# EAGLE board KeyVelocitysch (EAGLE 4.13)
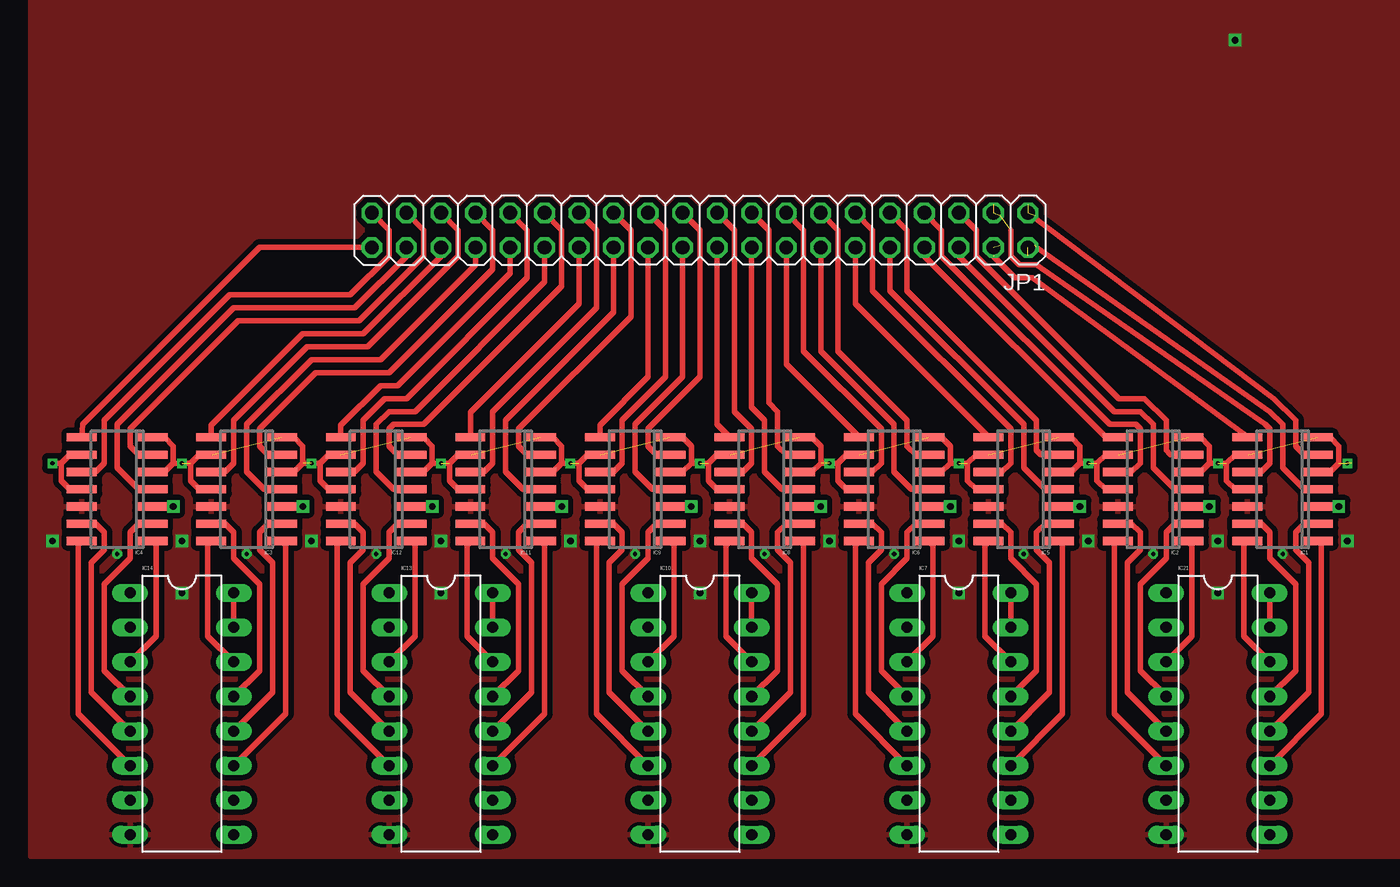
[diagram p0: board, top side]
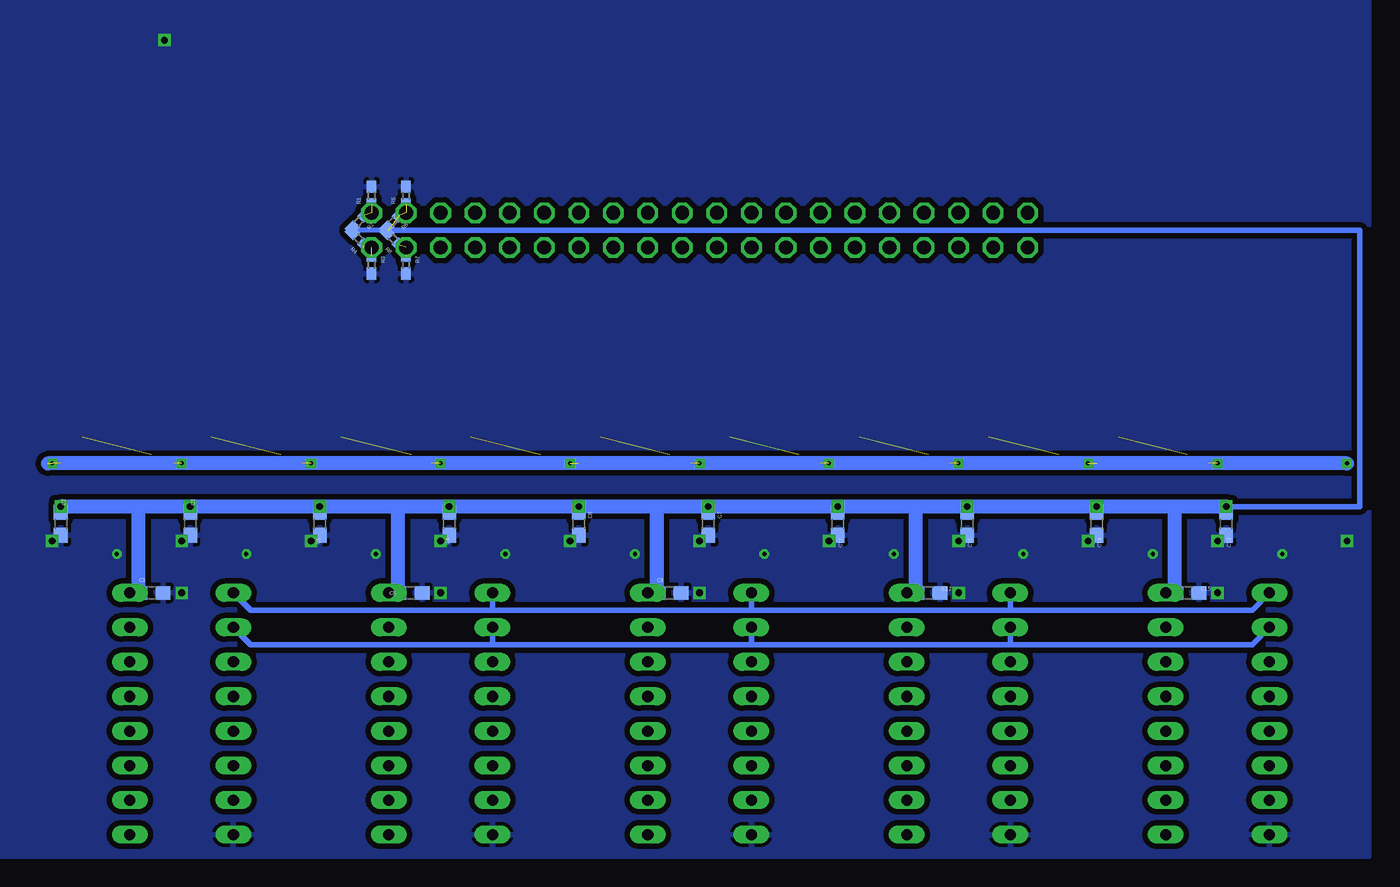
[diagram p1: board, bottom side, seen from below]

No outline drawn. Coordinates in mm, seen from the top.
Copper layers (1*16): Top 0.035mm / dielectric 1.5mm / Bottom 0.035mm
Design rules "default": minimum track width 10mil, minimum drill 24mil, track to track 8mil, track to pad 8mil, pad to pad 8mil, via to via 8mil, smd to smd 8mil, copper to edge 40mil, drill to drill 8mil, minimum pad ring 10mil, minimum via ring 8mil, stop-mask expansion 4mil, vias tented up to drill 0mil, thermal gap 10mil

## Footprints (pad centres in the part's own frame; a part is rotated, then mirrored left to right if it is on the bottom)
C0603 = smd 1.1 x 1: 1 -0.85,0; 2 0.85,0
SO14 = smd 0.6 x 2.2: 1 -3.81,-2.6; 2 -2.54,-2.6; 3 -1.27,-2.6; 4 0,-2.6; 5 1.27,-2.6; 6 2.54,-2.6; 7 3.81,-2.6; 8 3.81,2.6; 9 2.54,2.6; 10 1.27,2.6; 11 0,2.6; 12 -1.27,2.6; 13 -2.54,2.6; 14 -3.81,2.6
DIL16 = drill 0.813 long: 1 -8.89,-3.81; 2 -6.35,-3.81; 3 -3.81,-3.81; 4 -1.27,-3.81; 5 1.27,-3.81; 6 3.81,-3.81; 7 6.35,-3.81; 8 8.89,-3.81; 9 8.89,3.81; 10 6.35,3.81; 11 3.81,3.81; 12 1.27,3.81; 13 -1.27,3.81; 14 -3.81,3.81; 15 -6.35,3.81; 16 -8.89,3.81
2X20 = drill 1.016 octagon: 1 -24.13,-1.27; 2 -24.13,1.27; 3 -21.59,-1.27; 4 -21.59,1.27; 5 -19.05,-1.27; 6 -19.05,1.27; 7 -16.51,-1.27; 8 -16.51,1.27; 9 -13.97,-1.27; 10 -13.97,1.27; 11 -11.43,-1.27; 12 -11.43,1.27; 13 -8.89,-1.27; 14 -8.89,1.27; 15 -6.35,-1.27; 16 -6.35,1.27; 17 -3.81,-1.27; 18 -3.81,1.27; 19 -1.27,-1.27; 20 -1.27,1.27; 21 1.27,-1.27; 22 1.27,1.27; 23 3.81,-1.27; 24 3.81,1.27; 25 6.35,-1.27; 26 6.35,1.27; 27 8.89,-1.27; 28 8.89,1.27; 29 11.43,-1.27; 30 11.43,1.27; 31 13.97,-1.27; 32 13.97,1.27; 33 16.51,-1.27; 34 16.51,1.27; 35 19.05,-1.27; 36 19.05,1.27; 37 21.59,-1.27; 38 21.59,1.27; 39 24.13,-1.27; 40 24.13,1.27
R0402 = smd 0.9 x 0.7: 1 -0.65,0; 2 0.65,0

## Placement (x,y rotation side)
C1  0u1  [C0603]  89.53,19.37 0 bottom
C2  0u1  [C0603]  96.2,24.45 270 bottom
C3  0u1  [C0603]  86.68,24.45 270 bottom
C4  0u1  [C0603]  67.63,24.45 270 bottom
C5  0u1  [C0603]  77.15,24.45 270 bottom
C6  0u1  [C0603]  70.48,19.37 0 bottom
C7  0u1  [C0603]  48.58,24.45 270 bottom
C8  0u1  [C0603]  58.1,24.45 270 bottom
C9  0u1  [C0603]  51.44,19.37 0 bottom
C10  0u1  [C0603]  29.53,24.45 270 bottom
C11  0u1  [C0603]  39.05,24.45 270 bottom
C12  0u1  [C0603]  32.38,19.37 0 bottom
C13  0u1  [C0603]  10.48,24.45 270 bottom
C14  0u1  [C0603]  20,24.45 270 bottom
C15  0u1  [C0603]  13.34,19.37 0 bottom
IC1  LM339D  [SO14]  92.08,26.99 90 top
IC2  LM339D  [SO14]  82.55,26.99 90 top
IC3  LM339D  [SO14]  15.88,26.99 90 top
IC4  LM339D  [SO14]  6.35,26.99 90 top
IC5  LM339D  [SO14]  73.03,26.99 90 top
IC6  LM339D  [SO14]  63.5,26.99 90 top
IC7  74HC165N  [DIL16]  68.26,10.48 270 top
IC8  LM339D  [SO14]  53.98,26.99 90 top
IC9  LM339D  [SO14]  44.45,26.99 90 top
IC10  74HC165N  [DIL16]  49.21,10.48 270 top
IC11  LM339D  [SO14]  34.92,26.99 90 top
IC12  LM339D  [SO14]  25.4,26.99 90 top
IC13  74HC165N  [DIL16]  30.16,10.48 270 top
IC14  74HC165N  [DIL16]  11.11,10.48 270 top
IC21  74HC165N  [DIL16]  87.31,10.48 270 top
JP1  [2X20]  49.21,46.04 180 top
R1  [R0402]  73.34,48.58 90 bottom
R2  [R0402]  74.3,46.67 225 bottom
R3  [R0402]  73.34,43.5 270 bottom
R4  [R0402]  74.3,45.4 135 bottom
R5  [R0402]  70.8,48.58 90 bottom
R6  [R0402]  71.75,46.67 225 bottom
R7  [R0402]  70.8,43.5 270 bottom
R8  [R0402]  71.75,45.4 135 bottom

## Library data of the parts
C1-C15 R1-R8 = rcl
IC1-IC6 IC8 IC9 IC11 IC12 = linear
IC7 IC10 IC13 IC14 IC21 = 74xx-eu
JP1 = pinhead

## Nets
+5V: C1.1 C2.1 C3.1 C4.1 C5.1 C6.1 C7.1 C8.1 C9.1 C10.1 C11.1 C12.1 C13.1 C14.1 C15.1 IC1.3 IC2.3 IC3.3 IC4.3 IC5.3 IC6.3 IC7.15 IC7.16 IC8.3 IC9.3 IC10.15 IC10.16 IC11.3 IC12.3 IC13.15 IC13.16 IC14.15 IC14.16 IC21.15 IC21.16 R2.2 R4.2 R6.2 R8.2
COMP_A: IC1.5 IC1.7 IC1.9 IC1.11 IC2.5 IC2.7 IC2.9 IC2.11 IC3.5 IC3.7 IC3.9 IC3.11 IC4.5 IC4.7 IC4.9 IC4.11 IC5.5 IC5.7 IC5.9 IC5.11 IC6.5 IC6.7 IC6.9 IC6.11 IC8.5 IC8.7 IC8.9 IC8.11 IC9.5 IC9.7 IC9.9 IC9.11 IC11.5 IC11.7 IC11.9 IC11.11 IC12.5 IC12.7 IC12.9 IC12.11
D0: IC1.1 IC21.11
D1: IC1.2 IC21.12
D2: IC5.1 IC7.11
D3: IC5.2 IC7.12
D4: IC6.13 IC7.5
D5: IC6.14 IC7.6
D6: IC2.13 IC21.5
D7: IC2.14 IC21.6
D8: IC8.1 IC10.11
D9: IC8.2 IC10.12
D10: IC9.13 IC10.5
D11: IC9.14 IC10.6
D12: IC11.1 IC13.11
D13: IC11.2 IC13.12
D14: IC12.13 IC13.5
D15: IC12.14 IC13.6
D16: IC3.1 IC14.11
D17: IC3.2 IC14.12
D18: IC4.13 IC14.5
D19: IC4.14 IC14.6
GND: C1.2 C2.2 C3.2 C4.2 C5.2 C6.2 C7.2 C8.2 C9.2 C10.2 C11.2 C12.2 C13.2 C14.2 C15.2 IC1.12 IC2.12 IC3.12 IC4.12 IC5.12 IC6.12 IC7.8 IC8.12 IC9.12 IC10.8 IC11.12 IC12.12 IC13.8 IC14.8 IC21.8 R1.2 R3.2 R5.2 R7.2
IA1: IC1.6 JP1.1 R1.1 R2.1
IA2: IC1.4 JP1.2 R3.1 R4.1
IA3: IC1.10 JP1.3 R5.1 R6.1
IA4: IC1.8 JP1.4 R7.1 R8.1
IA5: IC2.6 JP1.5
IA6: IC2.4 JP1.6
IA7: IC2.10 JP1.7
IA8: IC2.8 JP1.8
IA9: IC5.6 JP1.9
IA10: IC5.4 JP1.10
IA11: IC5.10 JP1.11
IA12: IC5.8 JP1.12
IA13: IC6.6 JP1.13
IA14: IC6.4 JP1.14
IA15: IC6.10 JP1.15
IA16: IC6.8 JP1.16
IA17: IC8.6 JP1.17
IA18: IC8.4 JP1.18
IA19: IC8.10 JP1.19
IA20: IC8.8 JP1.20
IA21: IC9.6 JP1.21
IA22: IC9.4 JP1.22
IA23: IC9.10 JP1.23
IA24: IC9.8 JP1.24
IA25: IC11.6 JP1.25
IA26: IC11.4 JP1.26
IA27: IC11.10 JP1.27
IA28: IC11.8 JP1.28
IA29: IC12.6 JP1.29
IA30: IC12.4 JP1.30
IA31: IC12.10 JP1.31
IA32: IC12.8 JP1.32
IA33: IC3.6 JP1.33
IA34: IC3.4 JP1.34
IA35: IC3.10 JP1.35
IA36: IC3.8 JP1.36
IA37: IC4.6 JP1.37
IA38: IC4.4 JP1.38
IA39: IC4.10 JP1.39
IA40: IC4.8 JP1.40
N$1: IC3.14 IC14.14
N$2: IC1.14 IC21.14
N$3: IC1.13 IC21.13
N$4: IC2.1 IC21.3
N$5: IC5.14 IC7.14
N$6: IC5.13 IC7.13
N$7: IC6.1 IC7.3
N$8: IC6.2 IC7.4
N$9: IC3.13 IC14.13
N$10: IC2.2 IC21.4
N$11: IC7.2 IC10.2 IC13.2 IC14.2 IC21.2
N$13: IC8.14 IC10.14
N$14: IC8.13 IC10.13
N$15: IC9.1 IC10.3
N$16: IC9.2 IC10.4
N$17: IC7.1 IC10.1 IC13.1 IC14.1 IC21.1
N$18: IC11.14 IC13.14
N$19: IC11.13 IC13.13
N$20: IC12.1 IC13.3
N$21: IC12.2 IC13.4
N$23: IC4.1 IC14.3
N$24: IC4.2 IC14.4

## Tracks (layer width: path | path; a pad name or v marks a point on that pad's centre or on a via)
+5V  (via drill 0.5)
  Top 0.406: v86.68,25.72 IC2.3 | v96.2,25.72 IC1.3 | v67.63,25.72 IC6.3 | v77.15,25.72 IC5.3 | v48.58,25.72 IC9.3 | v58.1,25.72 IC8.3 | v29.53,25.72 IC12.3 | v39.05,25.72 IC11.3 | v10.48,25.72 IC4.3 | v20,25.72 IC3.3 | IC21.16 IC21.15 | IC7.16 IC7.15 | IC10.16 IC10.15 | IC13.16 IC13.15 | IC14.16 IC14.15
  Bottom 0.406: v96.2,25.72 C2.1 | v67.63,25.72 C4.1 | v20,25.72 C14.1 | C13.1 v10.48,25.72 0.64,25.72 0.64,46.04 72.39,46.04 | v39.05,25.72 C11.1 | v29.53,25.72 C10.1 | v58.1,25.72 C8.1 | v48.58,25.72 C7.1 | v77.15,25.72 C5.1 | v86.68,25.72 C3.1 | R2.2 R4.2 74.93,45.86 74.93,46.04 72.07,46.05 | R8.2 72.39,45.86 72.39,46.04 | 72.39,46.04 72.39,46.21 R6.2 72.07,46.21 72.07,46.05 | 72.07,46.05 72.07,46.04
  Bottom 1.016: 90.49,25.72 v86.68,25.72 v77.15,25.72 71.44,25.72 | 90.49,25.72 v96.2,25.72 | 71.44,25.72 v67.63,25.72 v58.1,25.72 52.39,25.72 | 52.39,25.72 v48.58,25.72 v39.05,25.72 33.34,25.72 | 33.34,25.72 v29.53,25.72 v20,25.72 14.29,25.72 | v10.48,25.72 14.29,25.72 | 90.49,19.37 C1.1 | 90.49,25.72 90.49,19.37 | 90.49,19.37 IC21.16 | 71.44,19.37 C6.1 | 71.44,25.72 71.44,19.37 | 71.44,19.37 IC7.16 | 52.39,19.37 C9.1 | 52.39,25.72 52.39,19.37 | 52.39,19.37 IC10.16 | 33.34,19.37 C12.1 | 33.34,25.72 33.34,19.37 | 33.34,19.37 IC13.16 | 14.29,19.37 C15.1 | 14.29,25.72 14.29,19.37 | 14.29,19.37 IC14.16
COMP_A  (via drill 0.3)  (20 unrouted)
  Top 0.406: IC4.9 2.86,29.53 2.22,28.89 | 2.22,28.89 2.22,27.62 2.86,26.99 IC4.11 | IC4.7 9.84,30.8 10.48,30.16 10.48,28.89 | 10.48,28.89 9.84,28.26 IC4.5 | IC3.11 12.38,26.99 11.75,27.62 11.75,28.89 | 11.75,28.89 12.38,29.53 IC3.9 13.34,29.53 | IC3.5 19.37,28.26 20,28.89 | 20,28.89 20,30.16 19.37,30.8 IC3.7 18.41,30.8 | 10.48,28.89 11.75,28.89 | IC12.9 21.91,29.53 21.27,28.89 | 21.27,28.89 21.27,27.62 21.91,26.99 IC12.11 22.86,26.99 | IC12.5 28.89,28.26 29.53,28.89 | 29.53,28.89 29.53,30.16 28.89,30.8 IC12.7 27.94,30.8 | IC11.11 31.43,26.99 30.8,27.62 30.8,28.89 | 30.8,28.89 31.43,29.53 IC11.9 32.38,29.53 | IC11.5 38.42,28.26 39.05,28.89 | 39.05,28.89 39.05,30.16 38.42,30.8 IC11.7 37.47,30.8 | IC9.11 40.96,26.99 40.32,27.62 40.32,28.89 | 40.32,28.89 40.96,29.53 IC9.9 41.91,29.53 | IC9.5 47.94,28.26 48.58,28.89 | 48.58,28.89 48.58,30.16 47.94,30.8 IC9.7 46.99,30.8 | IC8.11 50.48,26.99 49.85,27.62 49.85,28.89 | 49.85,28.89 50.48,29.53 IC8.9 51.44,29.53 | IC8.5 57.47,28.26 58.1,28.89 | 58.1,28.89 58.1,30.16 57.47,30.8 IC8.7 56.52,30.8 | IC6.11 60.01,26.99 59.37,27.62 59.37,28.89 | 59.37,28.89 60.01,29.53 IC6.9 60.96,29.53 | IC6.5 66.99,28.26 67.63,28.89 | 67.63,28.89 67.63,30.16 66.99,30.8 IC6.7 66.04,30.8 | IC5.11 69.53,26.99 68.9,27.62 68.9,28.89 | 68.9,28.89 69.53,29.53 IC5.9 | IC5.5 76.52,28.26 77.15,28.89 | 77.15,28.89 77.15,30.16 76.52,30.8 IC5.7 75.56,30.8 | 94.61,28.26 IC1.5 95.57,28.26 96.2,28.89 96.2,30.16 95.57,30.8 IC1.7 94.61,30.8 | IC2.11 79.06,26.99 78.42,27.62 78.42,28.89 | 78.42,28.89 79.06,29.53 IC2.9 80.01,29.53 | IC2.5 86.04,28.26 86.68,28.89 | 86.68,28.89 86.68,30.16 86.04,30.8 IC2.7
  Top 0.406: IC1.11 88.58,26.99 87.95,27.62 87.95,28.89 | 87.95,28.89 88.58,29.53 89.53,29.53 IC1.9 | 21.27,28.89 20,28.89 | 29.53,28.89 30.8,28.89 | 39.05,28.89 40.32,28.89 | 48.58,28.89 49.85,28.89 | 59.37,28.89 58.1,28.89 | 67.63,28.89 68.9,28.89 | 77.15,28.89 78.42,28.89 | 86.68,28.89 87.95,28.89 | 2.22,28.89 v1.59,28.89
  Bottom 1.016: v1.59,28.89 97.16,28.89
  other vias: 87.31,28.89 96.84,28.89 77.79,28.89 68.26,28.89 58.74,28.89 49.21,28.89 39.69,28.89 30.16,28.89 20.64,28.89 11.11,28.89
D0
  Top 0.406: IC1.1 94.93,23.18 94.93,10.48 IC21.11
D1
  Top 0.406: IC1.2 93.66,24.45 93.03,23.81 93.03,22.54 93.98,21.59 93.98,12.06 IC21.12
D2
  Top 0.406: IC7.11 75.88,10.48 75.88,23.18 IC5.1
D3
  Top 0.406: IC7.12 74.93,12.06 74.93,21.59 73.98,22.54 73.98,23.81 74.61,24.45 IC5.2
D4
  Top 0.406: IC6.13 61.91,24.45 62.55,23.81 62.55,22.54 61.59,21.59 61.59,12.06 IC7.5
D5
  Top 0.406: IC7.6 60.64,10.48 60.64,22.86 60.96,23.18 IC6.14
D6
  Top 0.406: IC2.13 80.96,24.45 81.6,23.81 81.6,22.54 80.64,21.59 80.64,12.06 IC21.5
D7
  Top 0.406: IC2.14 79.69,23.18 79.69,10.48 IC21.6
D8
  Top 0.406: IC10.11 56.83,10.48 56.83,23.18 IC8.1
D9
  Top 0.406: IC10.12 55.88,12.06 55.88,21.59 54.93,22.54 54.93,23.81 55.56,24.45 IC8.2
D10
  Top 0.406: IC10.5 42.55,12.06 42.55,21.59 43.5,22.54 43.5,23.81 42.86,24.45 IC9.13
D11
  Top 0.406: IC10.6 41.59,10.48 41.59,23.18 IC9.14
D12
  Top 0.406: IC13.11 37.78,10.48 37.78,22.86 37.47,23.18 IC11.1
D13
  Top 0.406: IC13.12 36.83,12.06 36.83,21.59 35.88,22.54 35.88,23.81 36.51,24.45 IC11.2
D14
  Top 0.406: IC13.5 23.5,12.06 23.5,21.59 24.45,22.54 24.45,23.81 23.81,24.45 IC12.13
D15
  Top 0.406: IC13.6 22.54,10.48 22.54,22.86 22.86,23.18 IC12.14
D16
  Top 0.406: IC14.11 18.73,10.48 18.73,22.86 18.41,23.18 IC3.1
D17
  Top 0.406: IC14.12 17.78,12.06 17.78,21.59 16.83,22.54 16.83,23.81 17.46,24.45 IC3.2
D18
  Top 0.406: IC14.5 4.45,12.06 4.45,21.59 5.4,22.54 5.4,23.81 4.76,24.45 IC4.13
D19
  Top 0.406: IC14.6 3.49,10.48 3.49,22.86 3.81,23.18 IC4.14
GND  (via drill 0.3, 0.5)
  other vias: 87.31,23.18 77.79,23.18 92.08,22.23 82.55,22.23 63.5,22.23 73.03,22.23 44.45,22.23 53.98,22.23 25.4,22.23 34.92,22.23 6.35,22.23 15.88,22.23 96.84,23.18 68.26,23.18 58.74,23.18 49.21,23.18 39.69,23.18 30.16,23.18 1.59,23.18 11.11,23.18 20.64,23.18 11.11,19.37 30.16,19.37 49.21,19.37 68.26,19.37 87.31,19.37 88.58,60.01
  pour Top (isolate 0.406): 0,0 100.65,0 100.65,160.34 0,160.34
  pour Bottom (isolate 0.406): 0,0 100.65,0 100.65,160.34 0,160.34
IA1  (2 unrouted)
  Top 0.406: IC1.6 93.66,29.53 93.03,30.16 93.03,32.07 91.44,33.66 JP1.1
IA2  (2 unrouted)
  Top 0.406: IC1.4 93.66,26.99 92.08,28.57 92.08,31.75 91.12,32.7 73.98,44.77 JP1.2
IA3  (3 unrouted)
  Top 0.406: IC1.10 90.49,28.26 91.12,28.89 91.12,31.43 90.81,31.75 73.98,43.5 72.71,43.5 72.07,44.13 72.07,46.04
IA4  (2 unrouted)
  Top 0.406: IC1.8 89.53,30.8 73.66,42.55 72.39,42.55 70.8,44.13 JP1.4
IA5
  Top 0.406: IC2.6 83.82,29.53 83.5,29.84 83.5,32.07 81.92,33.66 80.01,33.66 69.53,44.13 69.53,46.04 JP1.5
IA6
  Top 0.406: IC2.4 84.14,26.99 82.55,28.57 82.55,31.75 81.6,32.7 79.69,32.7 68.26,44.13 JP1.6
IA7
  Top 0.406: IC2.10 80.96,28.26 81.6,28.89 81.6,31.43 81.28,31.75 79.38,31.75 66.99,44.13 66.99,46.04 JP1.7
IA8
  Top 0.406: IC2.8 79.06,30.8 65.72,44.13 JP1.8
IA9
  Top 0.406: IC5.6 74.3,29.53 73.98,29.84 73.98,32.07 64.45,41.59 64.45,46.04 JP1.9
IA10
  Top 0.406: IC5.4 74.61,26.99 73.03,28.57 73.03,31.75 63.18,41.59 JP1.10
IA11
  Top 0.406: IC5.10 71.44,28.26 72.07,28.89 72.07,31.43 61.91,41.59 61.91,46.04 JP1.11
IA12
  Top 0.406: IC5.8 70.42,30.86 60.64,40.64 JP1.12
IA13
  Top 0.406: IC6.6 65.09,29.53 64.45,30.16 64.45,32.07 59.37,37.15 59.37,46.04 JP1.13
IA14
  Top 0.406: IC6.4 64.77,26.99 63.5,28.26 63.5,31.75 58.1,37.15 JP1.14
IA15
  Top 0.406: IC6.10 61.91,28.26 62.55,28.89 62.55,31.43 56.83,37.15 56.83,46.04 JP1.15
IA16
  Top 0.406: IC6.8 60.9,30.86 55.56,36.2 JP1.16
IA17
  Top 0.406: IC8.6 55.56,29.53 54.93,30.16 54.93,32.7 54.29,33.34 54.29,46.04 JP1.17
IA18
  Top 0.406: IC8.4 55.24,26.99 53.98,28.26 53.98,32.07 53.02,33.02 JP1.18
IA19
  Top 0.406: IC8.10 52.39,28.26 53.02,28.89 53.02,31.43 51.75,32.7 51.75,46.04 JP1.19
IA20
  Top 0.406: IC8.8 51.38,30.86 50.48,31.75 JP1.20
IA21
  Top 0.406: IC9.6 46.04,29.53 45.4,30.16 45.4,31.43 49.21,35.24 49.21,46.04 JP1.21
IA22
  Top 0.406: IC9.4 45.72,26.99 44.45,28.26 44.45,31.75 47.94,35.24 JP1.22
IA23
  Top 0.406: IC9.10 42.86,28.26 43.5,28.89 43.5,32.07 46.67,35.24 46.67,46.04 JP1.23
IA24
  Top 0.406: IC9.8 41.85,31.69 45.4,35.24 JP1.24
IA25
  Top 0.406: IC11.6 36.51,29.53 35.88,30.16 35.88,31.43 44.13,39.69 44.13,46.04 JP1.25
IA26
  Top 0.406: IC11.4 36.2,26.99 34.92,28.26 34.92,32.07 42.86,40.01 JP1.26
IA27
  Top 0.406: IC11.10 33.34,28.26 33.97,28.89 33.97,32.7 41.59,40.32 41.59,46.04 JP1.27
IA28
  Top 0.406: IC11.8 32.33,32.64 40.32,40.64 JP1.28
IA29
  Top 0.406: IC12.6 26.99,29.53 26.35,30.16 26.35,31.43 26.67,31.75 28.89,31.75 39.05,41.91 39.05,46.04 JP1.29
IA30
  Top 0.406: IC12.4 26.67,26.99 25.4,28.26 25.4,31.75 26.35,32.7 28.26,32.7 37.78,42.23 JP1.30
IA31
  Top 0.406: IC12.10 23.81,28.26 24.45,28.89 24.45,32.07 26.04,33.66 27.62,33.66 36.51,42.55 36.51,46.04 JP1.31
IA32
  Top 0.406: IC12.8 22.8,31.69 25.72,34.61 26.99,34.61 35.24,42.86 JP1.32
IA33
  Top 0.406: IC3.6 17.46,29.53 16.83,30.16 16.83,31.43 20.95,35.56 26.35,35.56 33.97,43.18 33.97,46.04 JP1.33
IA34
  Top 0.406: IC3.4 17.14,26.99 15.88,28.26 15.88,31.75 20.64,36.51 25.72,36.51 32.7,43.5 JP1.34
IA35
  Top 0.406: IC3.10 14.29,28.26 14.92,28.89 14.92,32.07 20.32,37.47 24.77,37.47 31.43,44.13 31.43,46.04 JP1.35
IA36
  Top 0.406: IC3.8 13.28,31.69 20,38.42 24.45,38.42 30.16,44.13 JP1.36
IA37
  Top 0.406: IC4.6 7.94,29.53 7.3,30.16 7.3,31.43 15.24,39.37 24.13,39.37 28.89,44.13 28.89,46.04 JP1.37
IA38
  Top 0.406: IC4.4 7.94,26.99 6.35,28.57 6.35,31.75 14.92,40.32 23.81,40.32 27.62,44.13 JP1.38
IA39
  Top 0.406: IC4.10 4.76,28.26 5.4,28.89 5.4,32.07 14.61,41.27 23.5,41.27 26.35,44.13 26.35,46.04 JP1.39
IA40
  Top 0.406: IC4.8 3.81,31.75 16.83,44.77 JP1.40
N$1
  Top 0.406: IC14.14 13.02,16.19 13.02,22.86 13.34,23.18 IC3.14
N$2
  Top 0.406: IC1.14 89.53,23.18 89.22,22.86 89.22,16.19 IC21.14
N$3
  Top 0.406: IC1.13 90.49,24.45 91.12,23.81 91.12,21.91 93.03,20 93.03,13.65 IC21.13
N$4
  Top 0.406: IC2.1 85.09,23.18 85.41,22.86 85.41,16.19 IC21.3
N$5
  Top 0.406: IC7.14 70.17,16.19 70.17,22.86 70.48,23.18 IC5.14
N$6
  Top 0.406: IC7.13 73.98,13.65 73.98,20 72.07,21.91 72.07,23.81 71.44,24.45 IC5.13
N$7
  Top 0.406: IC7.3 66.36,16.19 66.36,22.86 66.04,23.18 IC6.1
N$8
  Top 0.406: IC7.4 62.55,13.65 62.55,20 64.45,21.91 64.45,23.81 65.09,24.45 IC6.2
N$9
  Top 0.406: IC14.13 16.83,13.65 16.83,20 14.92,21.91 14.92,23.81 14.29,24.45 IC3.13
N$10
  Top 0.406: IC2.2 84.14,24.45 83.5,23.81 83.5,21.91 81.6,20 81.6,13.65 IC21.4
N$11
  Bottom 0.406: IC14.2 8.57,15.56 26.35,15.56 | 26.35,15.56 45.4,15.56 | 45.4,15.56 64.45,15.56 | 64.45,15.56 82.23,15.56 IC21.2 | 64.45,15.56 IC7.2 | 45.4,15.56 IC10.2 | 26.35,15.56 IC13.2
N$13
  Top 0.406: IC10.14 51.12,16.19 51.12,22.86 51.44,23.18 IC8.14
N$14
  Top 0.406: IC10.13 54.93,13.65 54.93,20 53.02,21.91 53.02,23.81 52.39,24.45 IC8.13
N$15
  Top 0.406: IC10.3 47.31,16.19 47.31,22.86 46.99,23.18 IC9.1
N$16
  Top 0.406: IC10.4 43.5,13.65 43.5,20 45.4,21.91 45.4,23.81 46.04,24.45 IC9.2
N$17
  Bottom 0.406: IC14.1 8.57,18.1 26.35,18.1 | 26.35,18.1 45.4,18.1 | 45.4,18.1 64.45,18.1 | 64.45,18.1 82.23,18.1 IC21.1 | 64.45,18.1 IC7.1 | 45.4,18.1 IC10.1 | 26.35,18.1 IC13.1
N$18
  Top 0.406: IC13.14 32.07,16.19 32.07,22.86 32.38,23.18 IC11.14
N$19
  Top 0.406: IC13.13 35.88,13.65 35.88,20 33.97,21.91 33.97,23.81 33.34,24.45 IC11.13
N$20
  Top 0.406: IC13.3 28.26,16.19 28.26,22.86 27.94,23.18 IC12.1
N$21
  Top 0.406: IC13.4 24.45,13.65 24.45,20 26.35,21.91 26.35,23.81 26.99,24.45 IC12.2
N$23
  Top 0.406: IC14.3 9.21,16.19 9.21,22.86 8.89,23.18 IC4.1
N$24
  Top 0.406: IC14.4 5.4,13.65 5.4,20 7.3,21.91 7.3,23.81 7.94,24.45 IC4.2